# Altium PCB Car Power Supply v2.PcbDoc
Units mm, origin at the board's own origin, x right, y up, seen from the top; angles counter-clockwise.
Board outline 152.4 x 101.6 mm, 2 copper layers (Top Layer, Bottom Layer); 25 components, 12 nets, 53 pads, 0 vias.
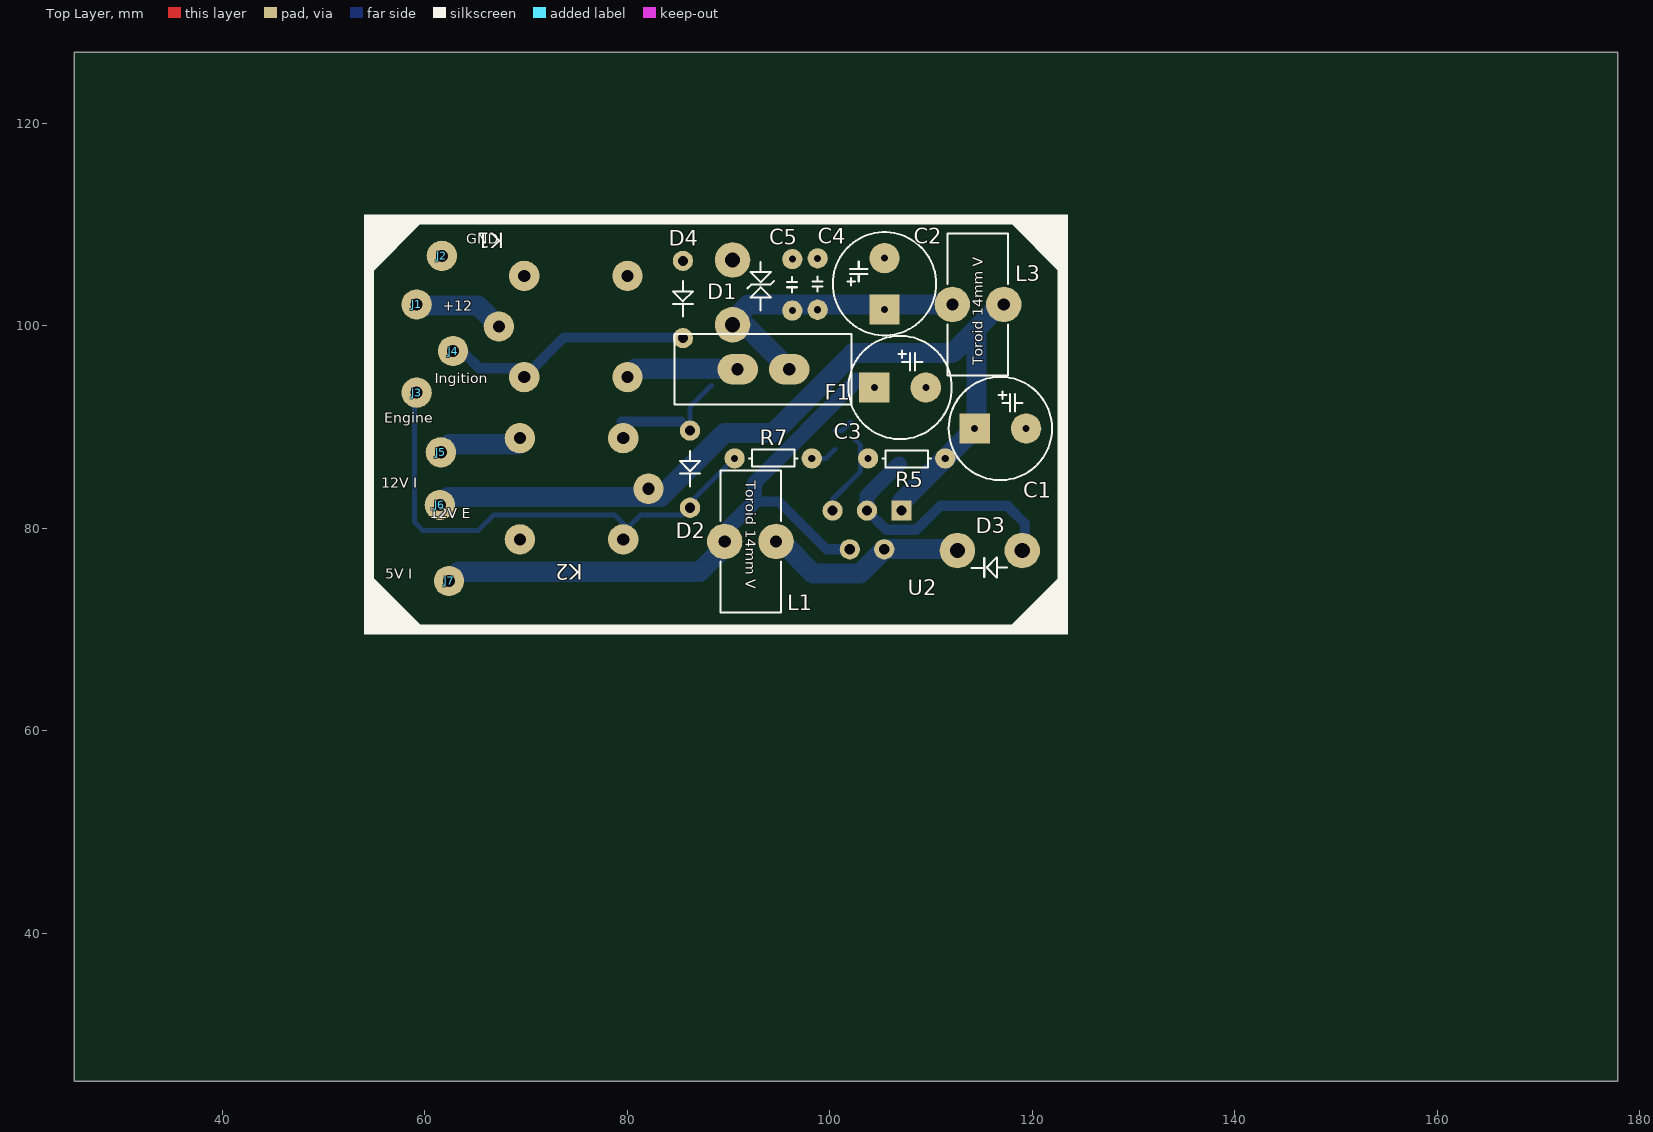
[diagram p0: Top Layer view]
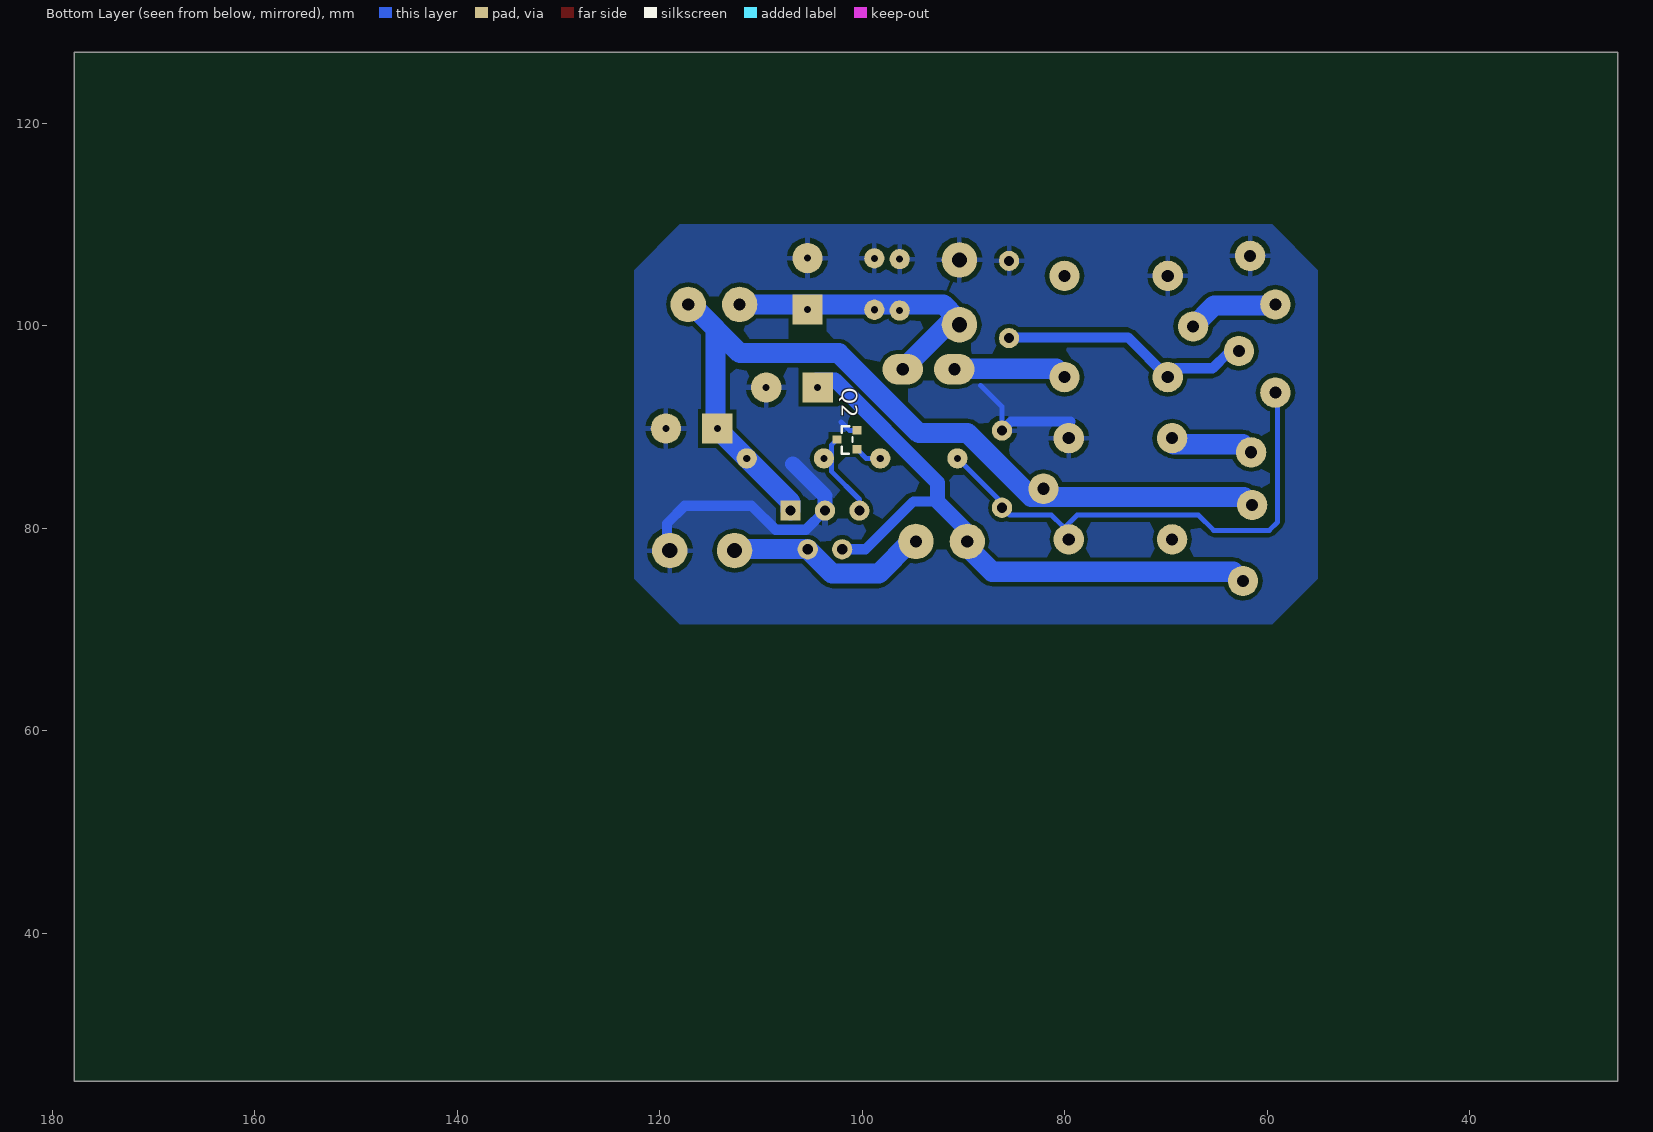
[diagram p1: Bottom Layer view, seen from below]
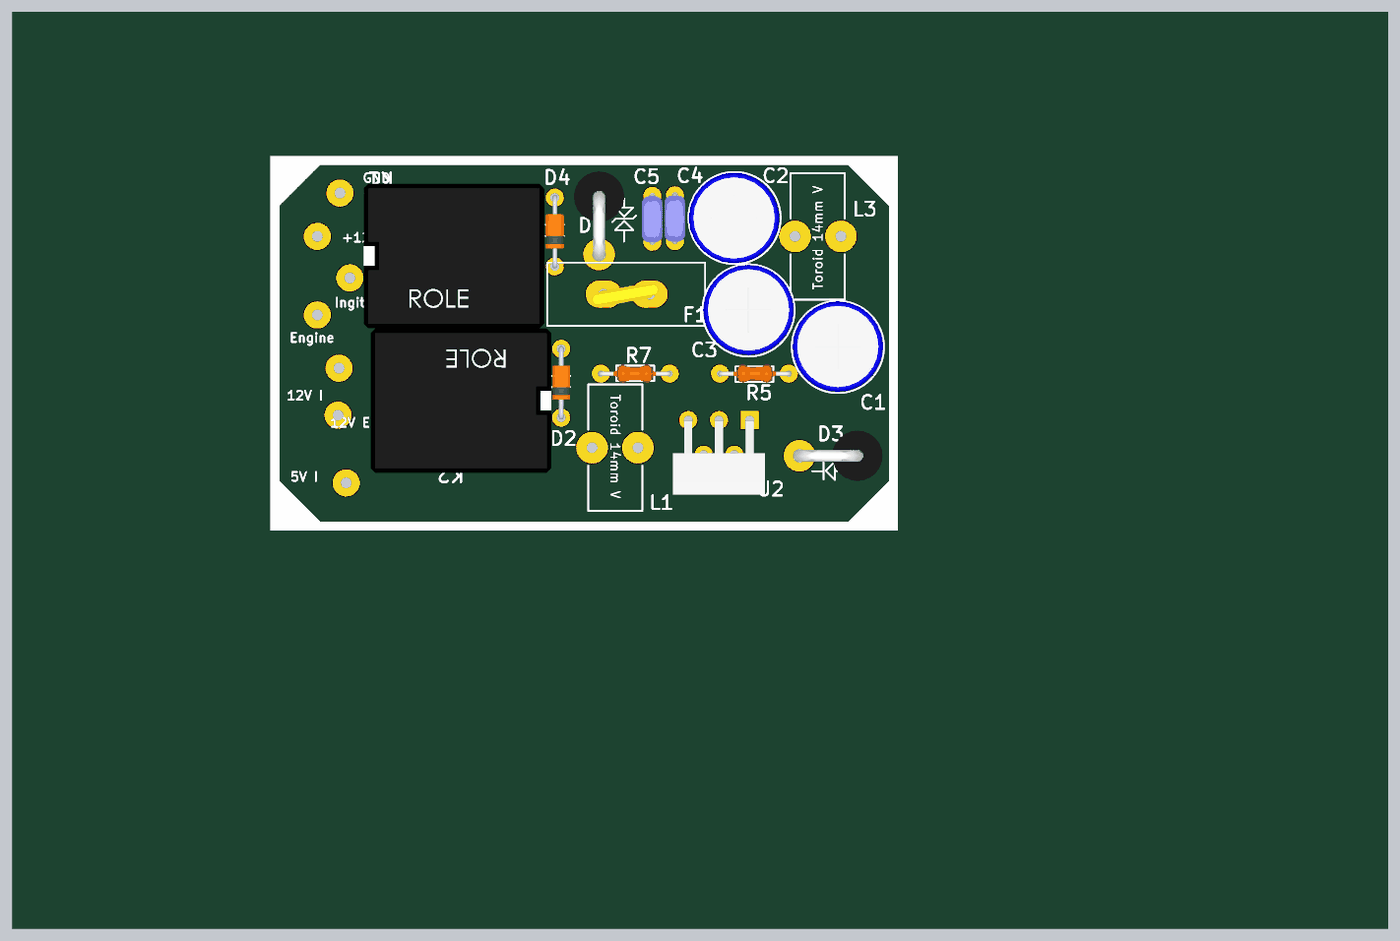
[diagram p2: 3D render of the assembled board from above, using the file's embedded part models]

## Layer stack, top to bottom
Top Solder: solder mask 0.0102, Solder Resist, Dk 3.5
Top Layer: signal copper 0.0356
Dielectric 1: dielectric 0.32, FR-4, Dk 4.8
Bottom Layer: signal copper 0.0356
Bottom Solder: solder mask 0.0102, Solder Resist, Dk 3.5

## Board outline
25.4,25.4 177.8,25.4 177.8,127 25.4,127

## Design rules (kind name [scope] priority, off if disabled: settings)
Clearance [All] p1: gap=0.4 ignorepadtopadclearanceinfootprint=FALSE except(0: Arc-Hole Track-Hole SMDPad-Hole THPad-Hole Via-Hole Fill-Hole Poly-Hole Region-Hole Text-Hole)
ComponentClearance [All] p1: gap=0 collisioncheckmode=3 verticalgap=0 showdistances=FALSE
PlaneConnect [All] p1: planeconnectstyle=Relief reliefexpansion=0.508 reliefentries=4 reliefconductorwidth=0.4 reliefairgap=0.5
PolygonConnect [All] p1: connectstyle=Relief reliefconductorwidth=0.5 reliefentries=4 polygonreliefangle="90 Angle" airgapwidth=0.5
RoutingVias [All] p1: holewidth=0.711 width=1.27 viastyle="Through Hole" minholewidth=0.711 minwidth=1.27 maxholewidth=0.711 maxwidth=1.27
SolderMaskExpansion [All] p1: expansion=0.102 istentingtop=FALSE
Width [All] p1: maxlimit=2 minlimit=0.2 preferedwidth=1
28 further rules are at their usual default settings.

## Components (designator, comment, footprint, x,y, rotation, side; value= is the part's Value field where it differs from the comment)
C1 "1000uF" "Cap E p5.08mm D10.2mm (3p)" 114.3,89.85 r0 top
C2 "1000uF" "Cap E p5.08mm D10.2mm (3p)" 105.4,101.6 r90 top
C3 "470mF" "Cap E p5.08mm D10.2mm (3p)" 104.4,93.9 r0 top
C4 "100n" "Cap P5.08MM (3p) disk2" 98.8,101.575 r90 top
C5 "10n" "Cap P5.08MM (3p) disk2" 96.3,101.5 r90 top
D1 "1.5KE20CA" "TVS diode DO-201 V" 90.4,106.5 r270 top
D2 "1N5819" "Diode DO-35" 86.2,89.65 r270 top
D3 "1N5822" "Diode DO-201 V" 119,77.8 r180 top
D4 "1N5819" "Diode DO-35" 85.5,106.4 r270 top
F1 "A" "Fuse RGE1100" 90.9,95.7 r90 top
J1 "OnePinC" "OnePin 1.2x3" 59.2,102.1 r90 top
J2 "OnePinC" "OnePin 1.2x3" 61.7,106.9 r90 top
J3 "OnePinC" "OnePin 1.2x3" 59.2,93.4 r90 top
J4 "OnePinC" "OnePin 1.2x3" 62.8,97.5 r90 top
J5 "OnePinC" "OnePin 1.2x3" 61.6,87.5 r90 top
J6 "OnePinC" "OnePin 1.2x3" 61.5,82.3 r90 top
J7 "OnePinC" "OnePin 1.2x3" 62.4,74.8 r90 top
K1 "SRA-12VDC-CL" SRA-12VDC-CL 67.325,99.925 r0 top
K2 "SRA-12VDC-CL" SRA-12VDC-CL 82.1,83.9 r180 top
L1 "Inductor V" "Toroid V D14-W6" 94.7,78.7 r180 top
L3 "Inductor V" "Toroid V D14-W6" 112.1,102.1 r0 top
Q2 "BC817-40" SOT-23 100.5,87.8 r90 bottom
R5 "10 kOm" "Res p7.62 (4p) 0.25w" 111.4,86.9 r180 top
R7 "1 kOm" "Res p7.62 (4p) 0.25w" 90.6,86.9 r0 top
U2 "LM2596T-5.0" "TO220-5 Vertical" 107.075,81.75 r90 top

## Footprints (in the part's own frame and the unit in brackets; to place one, negate y for a bottom-side part, rotate by r counter-clockwise, add the part's x,y. Pads: shape width x height; smd on the part's side, far side on the other; paste and mask are expansions set on the pad)
"Cap E p5.08mm D10.2mm (3p)" [mm] "D 10.2mm; H 17.5mm, Hole: 0.7mm"
  rect 3x3 hole 0.7: 1(0,0)
  round 3 hole 0.7: 2(5.08,0)
  silkscreen extent -2.56,-5.1 7.64,5.1, body extent -2.49,-4.97 7.57,5.08, height 16.53
"Cap P5.08MM (3p) disk2" [mm]
  round 2 hole 0.7: 1(0,0) 2(5.08,0)
  silkscreen extent 1.8,-0.48 3.3,0.53, body extent -0.29,-1.12 5.29,1.16, height 6.04
"Diode DO-35" [mm] "p7.62mm"
  round 2 hole 1: A(0,0) K(7.62,0)
  silkscreen extent 2,-1 5.5,1, body extent -0.32,-1 7.82,1.02, height 2.21
"Diode DO-201 V" [mm] "6p, p15.24mm"
  round 3.5 hole 1.5: A(0,0) K(6.4,0)
  silkscreen extent 1.5,0.67 5,2.67, body extent -2.8,-2.8 7.09,2.8, height 15.69
"Fuse RGE1100" [mm] "Resettable 11A"
  oval 3x4 hole 1.2: 1(0,0) 2(0,-5.1)
  silkscreen extent -3.5,-11.25 3.5,6.25, body extent -1.53,-6.19 1.43,1.39, height 15
"OnePin 1.2x3" [mm]
  round 3 hole 1.2: 1(0,0)
"Res p7.62 (4p) 0.25w" [mm] "L p7.62; horisontal"
  round 2 hole 0.7: 1(0,0) 2(7.62,0)
  silkscreen extent 1.4,-0.8 6.2,0.9, body extent -0.3,-1 7.8,1, height 2.1
SOT-23 [mm]
  rect 0.8x0.9 smd: 1(0,0) 2(1.875,0) 3(0.95,2)
  silkscreen extent -0.45,0.45 2.27,1.53, body extent -0.57,-0.32 2.43,2.32, height 1.08
SRA-12VDC-CL [mm]
  round 3 hole 1.2: 1(12.7,5) 2(0,0) 3(12.7,-5) 4(2.5,-5) 5(2.5,5)
  body extent -3,-8 17,8, height 15
"TO220-5 Vertical" [mm]
  rect 2x2 hole 1: 1(0,0)
  round 2 hole 1: 2(-3.825,1.7) 3(0,3.4) 4(-3.825,5.1) 5(0,6.8)
  body extent -8.24,-1.68 0,8.48, height 22.35
"Toroid V D14-W6" [mm] "10mm Black ring TEC.ORG"
  round 3.5 hole 1.2: 1(0,0) 2(5.08,0)
  silkscreen extent -0.5,-7 5.5,7
"TVS diode DO-201 V" [mm] "6p, p15.24mm"
  round 3.5 hole 1.5: 1(0,0) 2(6.4,0)
  silkscreen extent 0.2,1.47 5,4.07, body extent -2.8,-2.8 7.09,2.8, height 15.69

## Part data
C1 C2 C3: library part "Cap E 1000mF x 25V", "Capacitor"
C4 C5: library part "Cap Ceramic", "Capacitor"
D1: library part "TVS 1.5KE20CA", "1500W Transil (TVS Diode)"
D2 D4: library part "Diode 1N5819", "1 Amp General Purpose Rectifier"
D3: library part "D Shotki 1N5822", "3 Amp Shotki  Diode"
F1: library part Fuse, "Round fuse"
J1 J2 J3 J4 J5 J6 J7: library part "OnePin Connector", "Only pad"
K1 K2: "Single-Pole Dual-Throw Relay"
L1 L3: "Inductor Vertical"
Q2: "NPN 45 V, 500 mA NPN general-purpose transistor"
R5 R7: library part "Res All Types"
U2: "Voltage Regulator"

## Nets (pads, with @x,y where several pads share a name; then routed paths per layer and width w, separated by ;. In a path a pad name is that pad's centre, name@x,y a point inside that pad or via, vN(x,y) a via of type N, cw(c..) or ccw(c..) an arc to the next point about the centre after c; other vN are vias at no path point)
+5V: C3.1 J7.1 L1.2 U2.4 | length 63.7
  Bottom Layer w1: 92.55,82.65 94.95,82.65 99.675,77.925 U2.4
  Bottom Layer w1.5: L1.2@89.445,77.975 89.445,79.545 92.55,82.65 92.55,84.5 102.675,94.625 C3.1@104.5,94.625
  Bottom Layer w2: J7.1@62.4,74.75 63.35,75.7 87.17,75.7 L1.2@89.445,77.975
"+12 V RAW": C2.1 C4.1 C5.1 D1.2 F1.2 L3.1 | length 29
  Bottom Layer w2: D1.2 91.6,100.1 F1.2 ; D1.2@90.7,100.8 92,102.1 111.425,102.1 L3.1@111.65,102.325
+12V: J1.1 K1.2 | length 8.2
  Bottom Layer w2: J1.1@60,102 65.25,102 K1.2
"+12V ENGINE": J5.1 K2.3 | length 8
  Bottom Layer w2: J5.1 62.4,88.3 K2.3@69.225,88.3
"+12V NO NOISE": C1.1 J6.1 K2.2 L3.2 R5.1 U2.1 | length 87.9
  Bottom Layer w2: J6.1 62.3,83.1 83.3,83.1 89.6,89.4 94.4,89.4 102.3,97.3 112.075,97.3 L3.2@116.73,101.955 ; U2.1 107.075,82.575 114.475,89.975 114.475,99.7 L3.2@116.73,101.955 ; L3.2@116.73,102.325 L3.2@116.73,101.955
GND: C1.2 C2.2 C3.2 C4.2 C5.2 D1.1 D2.A D3.A D4.A J2.1 K1.5 K2.4 Q2.2 U2.3 | length 41.1
  Bottom Layer w0.5: D2.A 86.2,92 88.3,94.1 ; Q2.2 101.275,89.675 102.1,90.5
  Bottom Layer w1: 79.425,90.55 85.3,90.55 D2.A ; U2.3 105.575,79.85 107.25,79.85 108.55,79.85 110.925,82.225 117.525,82.225 119.275,80.475 D3.A@119.275,77.825
  Bottom Layer w1.5: U2.3 103.675,83.175 106.85,86.35
NetD3_K: D3.K L1.1 U2.2 | length 20.2
  Bottom Layer w2: L1.1@95.15,78.75 98.375,75.525 102.975,75.525 105.4,77.95 D3.K@113.025,77.95
NetF1_1: F1.1 K1.3 | length 11.2
  Bottom Layer w2: K1.3 80.85,95.75 90.85,95.75 F1.1
NetQ2_1: Q2.1 R7.2 | length 2.7
  Bottom Layer w0.5: R7.2 99.6,86.9 Q2.1
NetQ2_3: Q2.3 R5.2 U2.5 | length 8.4
  Bottom Layer w0.5: U2.5 100.275,82.85 103.05,85.625 103.05,88.2 Q2.3
"ON ENGINE": D2.K J3.1 K2.5 R7.1 | length 49.4
  Bottom Layer w0.5: J3.1@59.178,93.469 59,93.291 59,80.6 59.8,79.8 65.3,79.8 66.8,81.3 78.8,81.3 80.2,79.9 80.2,80.2 81.3,81.3 85.47,81.3 86,82.33 R7.1@90.635,86.965
"ON INGITION": D4.K J4.1 K1.4 | length 25.9
  Bottom Layer w1: J4.1@62.188,97.263 63.937,97.263 65.4,95.8 68.95,95.8 K1.4 73.755,98.855 D4.K@85.5,98.855
pads on no net: K1.1 K2.1

## Polygon pours and split planes (outlines as drawn)
GND on Bottom Layer "Top Layer-No Net" (solid, pour order 2): 55,105.5 59.5,110 118,110 122.5,105.5 122.5,75 118,70.5 59.5,70.5 55,75

## Silkscreen, mask and mechanical layers (free items; w line width, h text height)
Top Overlay:
  rectangle: 122.5,70.5 123.5,110
  rectangle: 54,69.5 123.5,70.5
  rectangle: 54,70.5 55,110
  rectangle: 54,110 123.5,111
  region: 122.5,105.5 118,110 122.5,110
  region: 118,70.5 122.5,75 122.5,70.5
  region: 55,75 59.5,70.5 55,70.5
  region: 59.5,110 55,105.5 55,110
  text "GND" at 64.1,108.1 h1
  text "+12" at 61.8,101.5 h1
  text "Ingition" at 61,94.3 h1
  text "Engine" at 56,90.4 h1
  text "12V I" at 55.7,84 h1
  text "12V E" at 60.5,81 h1
  text "5V I" at 56.1,75 h1

## Text inside footprints (layer, text, board x,y; h text height)
L1: Top Overlay "Toroid 14mm V" at 91.7,84.7 h1 r270
L3: Top Overlay "Toroid 14mm V" at 115.1,96.1 h1 r90